# EAGLE board SOT-223 Breakout Board (EAGLE 8.4.1)
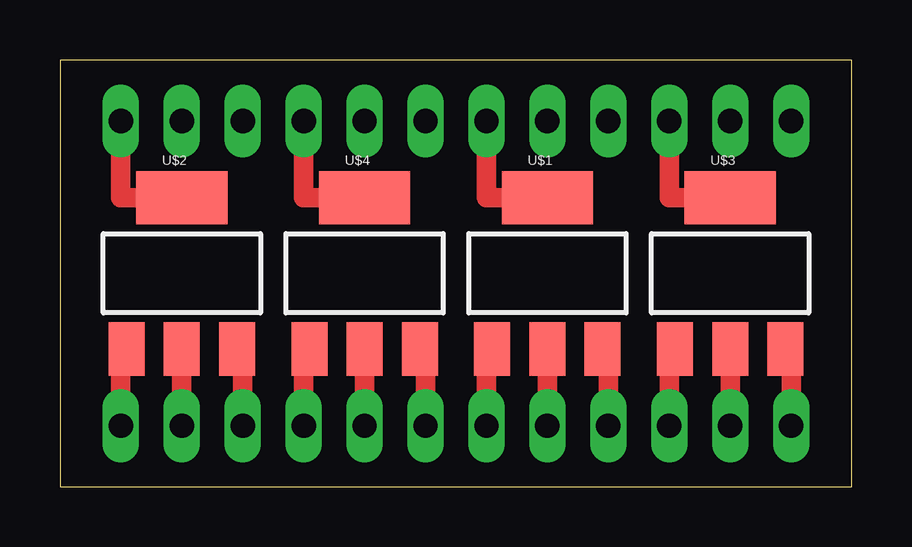
[diagram p0: board, top side]
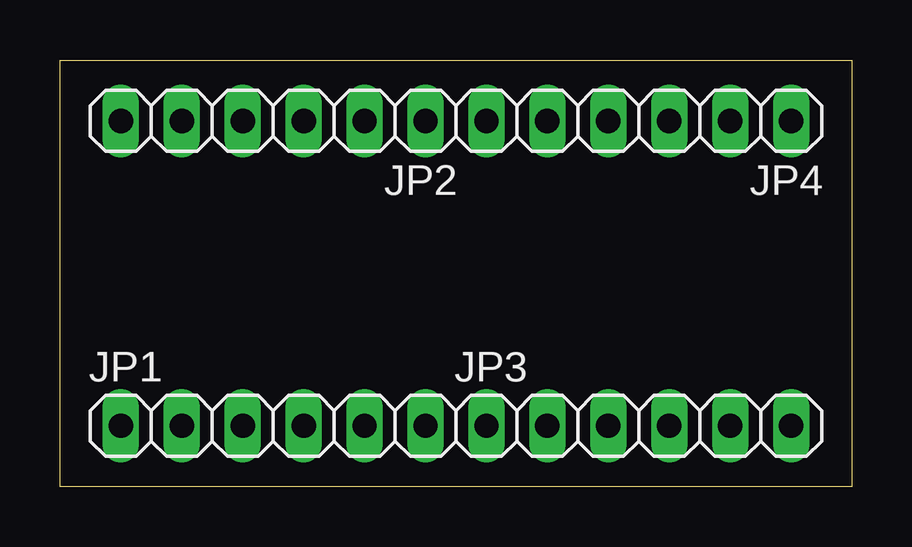
[diagram p1: board, bottom side, seen from below]

Size 33.02 x 17.78 mm. Coordinates in mm from the lower left corner, seen from the top.
Outline: 0,0 33,0 33.02,17.78 0,17.78 0,0
Copper layers (1*16): Top 0.035mm / dielectric 1.5mm / Bottom 0.035mm
Design rules "default": minimum track width 10mil, minimum drill 24mil, track to track 8mil, track to pad 8mil, pad to pad 8mil, via to via 8mil, smd to smd 8mil, copper to edge 40mil, drill to drill 8mil, minimum pad ring 10mil, minimum via ring 8mil, stop-mask expansion 4mil, vias tented up to drill 0mil, thermal gap 10mil

## Footprints (pad centres in the part's own frame; a part is rotated, then mirrored left to right if it is on the bottom)
1X06 = drill 1.016 long: 1 -6.35,0; 2 -3.81,0; 3 -1.27,0; 4 1.27,0; 5 3.81,0; 6 6.35,0
SOT223 = smd 1.5 x 2.235: 1 -2.3,-3.15; 2 0,-3.15; 3 2.3,-3.15 | smd 3.8 x 2.2: 4 0,3.15

## Placement (x,y rotation side)
JP1  [1X06]  24.13,2.54 0 bottom
JP2  [1X06]  24.13,15.24 180 bottom
JP3  [1X06]  8.89,2.54 0 bottom
JP4  [1X06]  8.89,15.24 180 bottom
U$1  SOT223  [SOT223]  20.32,8.89 0 top
U$2  SOT223  [SOT223]  5.08,8.89 0 top
U$3  SOT223  [SOT223]  27.94,8.89 0 top
U$4  SOT223  [SOT223]  12.7,8.89 0 top

## Library data of the parts
JP1-JP4 U$1-U$4 = HyTechDevices

## Nets
N$1: JP2.1 U$1.4
N$2: JP1.6 U$1.1
N$3: JP1.5 U$1.2
N$4: JP1.4 U$1.3
N$5: JP1.3 U$3.1
N$6: JP1.2 U$3.2
N$7: JP1.1 U$3.3
N$8: JP2.4 U$3.4
N$9: JP4.1 U$2.4
N$10: JP4.4 U$4.4
N$11: JP3.6 U$2.1
N$12: JP3.5 U$2.2
N$13: JP3.4 U$2.3
N$14: JP3.3 U$4.1
N$15: JP3.2 U$4.2
N$16: JP3.1 U$4.3

## Tracks (layer width: path | path; a pad name or v marks a point on that pad's centre or on a via)
N$1
  Top 0.813: U$1.4 17.78,12.04 JP2.1
N$2
  Top 0.813: U$1.1 17.78,5.74 JP1.6
N$3
  Top 0.813: U$1.2 JP1.5
N$4
  Top 0.813: U$1.3 22.86,5.74 JP1.4
N$5
  Top 0.813: U$3.1 25.4,5.74 JP1.3
N$6
  Top 0.813: U$3.2 JP1.2
N$7
  Top 0.813: U$3.3 30.48,5.74 JP1.1
N$8
  Top 0.813: U$3.4 25.4,12.04 JP2.4
N$9
  Top 0.813: U$2.4 2.54,12.04 JP4.1
N$10
  Top 0.813: U$4.4 10.16,12.04 JP4.4
N$11
  Top 0.813: U$2.1 2.54,5.74 JP3.6
N$12
  Top 0.813: U$2.2 JP3.5
N$13
  Top 0.813: U$2.3 7.62,5.74 JP3.4
N$14
  Top 0.813: U$4.1 10.16,5.74 JP3.3
N$15
  Top 0.813: U$4.2 JP3.2
N$16
  Top 0.813: U$4.3 15.24,5.74 JP3.1

## Text on the board
tDocu: HyTech Racing | SOT223